# EAGLE board Cohort b tEAM 2 (EAGLE 9.6.2)
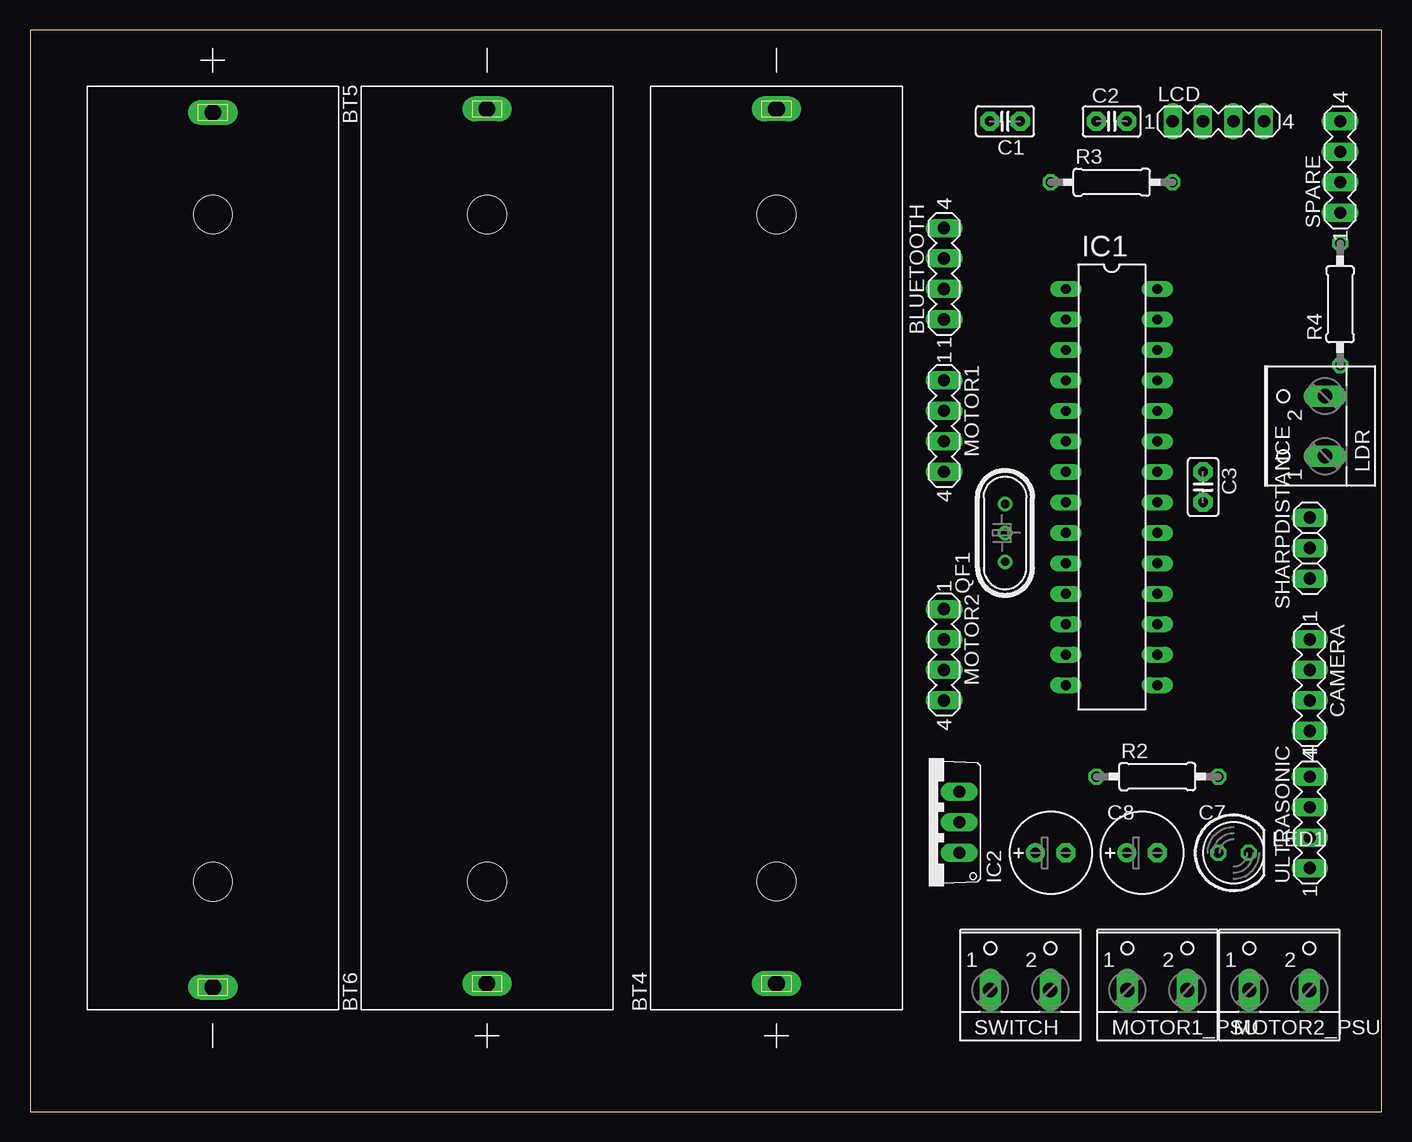
[diagram p0: board, top side]
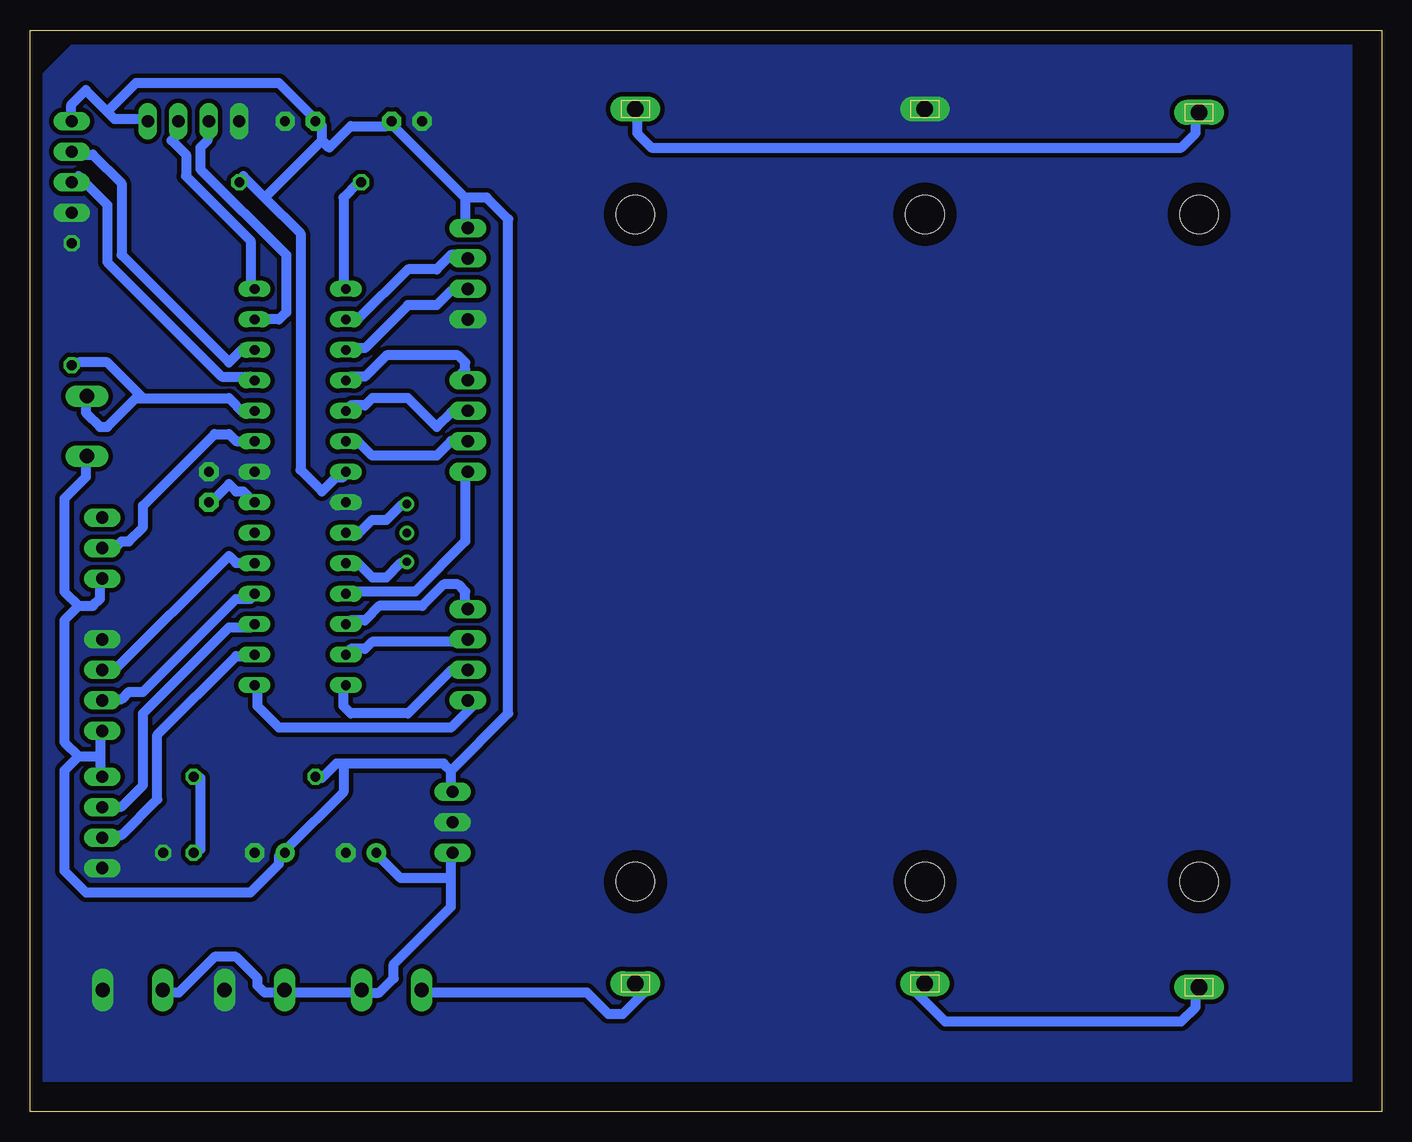
[diagram p1: board, bottom side, seen from below]

Size 112.7 x 90.16 mm. Coordinates in mm from the lower left corner, seen from the top.
Outline: 0,0 112.7,0 112.7,90.16 0,90.16 0,0
Copper layers (1*16): Top 0.035mm / dielectric 1.5mm / Bottom 0.035mm
Design rules "default *": minimum track width 32mil, minimum drill 0.35mm, track to track 15mil, track to pad 15mil, pad to pad 6mil, via to via 6mil, smd to smd 6mil, copper to edge 40mil, drill to drill 6mil, minimum pad ring 10mil, minimum via ring 8mil, stop-mask expansion 4mil, vias tented up to drill 0mil, thermal gap 0mil

## Footprints (pad centres in the part's own frame; a part is rotated, then mirrored left to right if it is on the bottom)
MA04-1 = drill 1.016 long: 1 -3.81,0; 2 -1.27,0; 3 1.27,0; 4 3.81,0
BAT_BK-18650-PC2 = drill 1.38 long: + -36.3,0; - 36.6,0 | hole 3.2: -27.805,0; 27.81,0
C2.5-2 = drill 0.813 pad 1.6 octagon: 1 -1.27,0; 2 1.27,0
E2,5-7 = drill 0.813 pad 1.6: + -1.27,0 | drill 0.813 pad 1.6 octagon: - 1.27,0
DIL28-3 = drill 0.813 long: 1 -16.51,-3.81; 2 -13.97,-3.81; 3 -11.43,-3.81; 4 -8.89,-3.81; 5 -6.35,-3.81; 6 -3.81,-3.81; 7 -1.27,-3.81; 8 1.27,-3.81; 9 3.81,-3.81; 10 6.35,-3.81; 11 8.89,-3.81; 12 11.43,-3.81; 13 13.97,-3.81; 14 16.51,-3.81; 15 16.51,3.81; 16 13.97,3.81; 17 11.43,3.81; 18 8.89,3.81; 19 6.35,3.81; 20 3.81,3.81; 21 1.27,3.81; 22 -1.27,3.81; 23 -3.81,3.81; 24 -6.35,3.81; 25 -8.89,3.81; 26 -11.43,3.81; 27 -13.97,3.81; 28 -16.51,3.81
TO220V = drill 1.016 long: 1 -2.54,-2.54; 2 0,-2.54; 3 2.54,-2.54
W237-102 = drill 1.194 long: 1 -2.5,-1.27; 2 2.5,-1.27
LED5MM = drill 0.813 octagon: A -1.27,0; K 1.27,0
HC49U = drill 0.7 pad 1.2: 1 -2.413,0; 2 -0.027,0; 3 2.413,0
0207/10 = drill 0.813 octagon: 1 -5.08,0; 2 5.08,0
1X03 = drill 1.016 long: 1 -2.54,0; 2 0,0; 3 2.54,0

## Placement (x,y rotation side)
BLUETOOTH  [MA04-1]  76.2,69.85 90 top
BT4  BK-18650-PC2  [BAT_BK-18650-PC2]  62.23,46.99 90 top
BT5  BK-18650-PC2  [BAT_BK-18650-PC2]  15.24,46.99 270 top
BT6  BK-18650-PC2  [BAT_BK-18650-PC2]  38.1,46.99 90 top
C1  [C2.5-2]  81.28,82.55 180 top
C2  [C2.5-2]  90.17,82.55 0 top
C3  [C2.5-2]  97.79,52.07 270 top
C7  [E2,5-7]  92.71,21.59 0 top
C8  100U  [E2,5-7]  85.09,21.59 0 top
CAMERA  [MA04-1]  106.68,35.56 270 top
IC1  MEGA8-P  [DIL28-3]  90.17,52.07 270 top
IC2  7805TV  [TO220V]  74.93,24.13 90 top
LCD  [MA04-1]  99.06,82.55 0 top
LDR  [W237-102]  106.68,57.15 90 top
LED1  [LED5MM]  100.33,21.59 0 top
MOTOR1  [MA04-1]  76.2,57.15 270 top
MOTOR1_PSU  [W237-102]  93.98,11.43 0 top
MOTOR2  [MA04-1]  76.2,38.1 270 top
MOTOR2_PSU  [W237-102]  104.14,11.43 0 top
QF1  8M10AHC49T  [HC49U]  81.28,48.26 90 top
R2  [0207/10]  93.98,27.94 0 top
R3  10k  [0207/10]  90.17,77.47 0 top
R4  10k  [0207/10]  109.22,67.31 90 top
SHARPDISTANCE  [1X03]  106.68,46.99 90 top
SPARE  [MA04-1]  109.22,78.74 90 top
SWITCH  [W237-102]  82.55,11.43 0 top
ULTRASONIC  [MA04-1]  106.68,24.13 90 top

## Library data of the parts
BLUETOOTH CAMERA LCD MOTOR1 MOTOR2 SPARE ULTRASONIC = con-lstb; OC_FARNELL: unknown; OC_NEWARK: unknown
BT4-BT6 = BK-18650-PC2; AVAILABILITY: In Stock; DESCRIPTION: Battery Holder (Open) 18650 1 Cell PC Pin; MF: MPD (Memory Protection Devices); MP: BK-18650-PC2; PACKAGE: None; PRICE: None; PURCHASE-URL: https://pricing.snapeda.com/search/part/BK-18650-PC2/?ref=eda
C1-C3 = capacitor-wima
C7 C8 = rcl; SPICEPREFIX: C
IC1 = atmel; OC_FARNELL: unknown; OC_NEWARK: unknown
IC2 = linear
LDR MOTOR1_PSU MOTOR2_PSU SWITCH = con-wago-500; MPN: 237-102; OC_FARNELL: unknown; OC_NEWARK: 70K9898
LED1 = led
QF1 = crystal; OC_FARNELL: unknown; OC_NEWARK: unknown
R2-R4 = rcl; SPICEPREFIX: R
SHARPDISTANCE = pinhead

## Nets
+12V: C8.+ IC2.1 MOTOR1_PSU.1 MOTOR2_PSU.1 SWITCH.2
AVCC: IC1.20
ECHO: IC1.17 ULTRASONIC.3
GND: BLUETOOTH.1 BT6.- C1.2 C2.2 C3.1 C7.- C8.- CAMERA.1 IC1.8 IC1.22 IC2.2 LCD.1 LED1.K MOTOR1_PSU.2 MOTOR2_PSU.2 R4.2 SPARE.1 ULTRASONIC.1
IN1: IC1.4 MOTOR1.1
IN2: IC1.5 MOTOR1.2
IN3: IC1.6 MOTOR1.3
IN4: IC1.11 MOTOR1.4
IN5: IC1.12 MOTOR2.1
IN6: IC1.13 MOTOR2.2
IN7: IC1.14 MOTOR2.3
IN8: IC1.15 MOTOR2.4
LDR: IC1.24 LDR.2 R4.1
N$1: BT4.- BT5.+
N$2: BT5.- BT6.+
N$3: LED1.A R2.2
N$5: IC1.1 R3.1
N$6: C3.2 IC1.21
N$7: IC1.9 QF1.3
N$8: IC1.10 QF1.1
N$9: SHARPDISTANCE.3
N$27: BT4.+ SWITCH.1
RXD: BLUETOOTH.2 IC1.3
SCL: IC1.28 LCD.3
SDA: IC1.27 LCD.2
SP1: CAMERA.3 IC1.18
SP2: CAMERA.2 IC1.19
SP3: IC1.25 SPARE.2
SP4: IC1.26 SPARE.3
TRIGGER: IC1.16 ULTRASONIC.2
TXD: BLUETOOTH.3 IC1.2
V_OUT: IC1.23 SHARPDISTANCE.2
VCC: BLUETOOTH.4 C1.1 C2.1 C7.+ CAMERA.4 IC1.7 IC2.3 LCD.4 LDR.1 R2.1 R3.2 SHARPDISTANCE.1 SPARE.4 ULTRASONIC.4

## Tracks (layer width: path | path; a pad name or v marks a point on that pad's centre or on a via)
+12V
  Bottom 0.813: 77.61,19.48 77.61,17.09 82.38,12.32 82.38,11.12 83.58,9.93 84.77,9.93 SWITCH.2 85.37,9.93 91.34,9.93 MOTOR1_PSU.1 91.94,9.93 93.13,9.93 93.73,10.53 93.73,11.12 95.52,12.92 97.31,12.92 100.29,9.93 101.49,9.93 MOTOR2_PSU.1 | 77.61,19.48 77.61,21.27 IC2.1 | 77.61,19.48 81.79,19.48 83.58,21.27 C8.+
ECHO
  Bottom 0.813: IC1.17 94.32,40.37 96.11,40.37 103.28,33.21 103.28,27.24 105.07,25.45 106.26,25.45 ULTRASONIC.3
GND
  pour Bottom: 2.54,88.9 2.54,2.54 111.76,2.54 111.76,86.36 109.22,88.9 3.81,88.9
IN1
  Bottom 0.813: IC1.4 85.97,61.27 84.77,61.27 82.98,63.06 77.01,63.06 76.42,62.46 76.42,61.86 77.01,61.27 76.42,60.67 MOTOR1.1
IN2
  Bottom 0.813: IC1.5 85.97,58.88 84.77,58.88 84.18,59.47 81.19,59.47 78.8,57.09 77.61,58.28 76.42,58.28 MOTOR1.2
IN3
  Bottom 0.813: IC1.6 85.97,55.89 85.37,55.89 84.18,54.7 78.8,54.7 77.61,55.89 76.42,55.89 MOTOR1.3
IN4
  Bottom 0.813: IC1.11 85.97,43.36 80.59,43.36 76.42,47.54 76.42,52.91 MOTOR1.4
IN5
  Bottom 0.813: IC1.12 85.97,40.97 84.77,40.97 83.58,42.16 80,42.16 78.21,43.95 77.01,43.95 76.42,43.36 76.42,42.16 MOTOR2.1
IN6
  Bottom 0.813: IC1.13 85.97,38.58 84.77,38.58 84.18,39.18 76.42,39.18 MOTOR2.2
IN7
  Bottom 0.813: IC1.14 86.56,35 86.56,33.81 85.97,33.21 81.19,33.21 77.61,36.79 76.42,36.79 MOTOR2.3
IN8
  Bottom 0.813: IC1.15 93.73,35 93.73,33.81 91.94,32.02 77.61,32.02 75.82,33.81 MOTOR2.4
LDR
  Bottom 0.813: 103.28,59.47 103.87,59.47 106.26,57.09 106.86,57.09 108.05,58.28 108.05,59.47 LDR.2 | 103.28,59.47 96.11,59.47 94.92,58.28 94.32,58.28 IC1.24 | 103.28,59.47 106.26,62.46 108.65,62.46 R4.1
N$1
  Bottom 0.813: BT5.+ 15.53,82.75 15.53,81.56 16.73,80.37 60.9,80.37 62.09,81.56 62.09,83.35 BT4.-
N$2
  Bottom 0.813: BT5.- 15.53,9.93 15.53,8.74 16.73,7.54 36.42,7.54 38.81,9.93 38.81,10.53 38.21,11.12 BT6.+
N$3
  Bottom 0.813: LED1.A 98.5,21.87 98.5,27.84 R2.2
N$5
  Bottom 0.813: IC1.1 86.56,69.02 86.56,76.19 85.37,77.38 R3.1
N$6
  Bottom 0.813: IC1.21 94.32,51.12 94.92,51.71 95.52,51.71 96.11,52.31 97.31,51.12 C3.2
N$7
  Bottom 0.813: QF1.3 81.79,50.52 82.98,49.33 84.18,49.33 85.37,48.13 85.97,48.13 IC1.9
N$8
  Bottom 0.813: QF1.1 81.79,45.75 82.98,44.55 84.18,44.55 85.37,45.75 85.97,45.75 IC1.10
N$27
  Bottom 0.813: SWITCH.1 80,9.93 66.27,9.93 64.48,8.14 63.28,8.14 61.49,9.93 61.49,10.53 62.09,11.12 BT4.+
RXD
  Bottom 0.813: IC1.3 85.97,63.65 84.77,63.65 81.19,67.23 78.8,67.23 77.61,68.43 76.42,68.43 BLUETOOTH.2
SCL
  Bottom 0.813: IC1.28 94.32,69.02 94.32,72.61 99.69,77.98 99.69,79.77 100.89,80.96 100.29,81.56 100.29,82.16 LCD.3
SDA
  Bottom 0.813: IC1.27 91.94,66.04 91.34,66.64 91.34,71.41 98.5,78.57 98.5,80.37 97.9,80.96 97.9,82.16 LCD.2
SP1
  Bottom 0.813: IC1.18 94.32,42.76 95.52,42.76 103.28,35 104.47,35 105.07,34.4 106.26,34.4 CAMERA.3
SP2
  Bottom 0.813: IC1.19 94.32,45.75 95.52,45.75 96.11,46.34 105.66,36.79 106.26,36.79 CAMERA.2
SP3
  Bottom 0.813: IC1.25 94.32,61.27 96.71,61.27 106.26,70.81 106.26,75.59 108.65,77.98 SPARE.2
SP4
  Bottom 0.813: IC1.26 94.32,63.65 94.92,63.65 96.11,62.46 105.07,71.41 105.07,77.38 107.45,79.77 108.65,79.77 SPARE.3
TRIGGER
  Bottom 0.813: IC1.16 94.32,37.99 95.52,37.99 102.08,31.42 102.08,26.05 105.07,23.06 106.26,23.06 ULTRASONIC.2
TXD
  Bottom 0.813: IC1.2 85.37,66.04 81.19,70.22 78.8,70.22 77.61,71.41 76.42,71.41 BLUETOOTH.3
V_OUT
  Bottom 0.813: IC1.23 94.32,55.89 95.52,55.89 96.11,56.49 97.31,56.49 103.28,50.52 103.28,48.73 104.47,47.54 105.07,47.54 105.66,46.94 106.26,46.94 SHARPDISTANCE.2
VCC
  Bottom 0.813: 76.42,76.19 76.42,73.8 BLUETOOTH.4 | 76.42,76.19 82.38,82.16 C1.1 82.98,82.16 85.97,82.16 87.76,80.37 88.35,80.96 | 106.26,83.35 108.05,85.14 109.24,83.95 109.24,82.75 SPARE.4 | 106.26,83.35 105.66,82.75 103.28,82.75 LCD.4 | 93.13,76.19 94.92,77.98 R3.2 | 93.13,76.19 90.14,73.2 90.14,53.51 88.35,51.71 87.16,52.91 86.56,52.91 IC1.7 | 88.35,80.96 88.35,82.16 C2.1 88.95,82.75 91.94,85.74 103.87,85.74 106.26,83.35 | 93.13,76.19 88.35,80.96 | 86.56,29.03 78.21,29.03 77.61,28.44 | 86.56,29.03 87.16,29.03 88.35,27.84 R2.1 | 77.61,28.44 77.61,27.24 IC2.3 | 86.56,29.03 86.56,26.65 91.34,21.87 C7.+ 91.94,21.27 91.94,20.68 94.32,18.29 108.05,18.29 109.84,20.08 109.84,28.44 108.65,29.63 | 106.86,29.63 106.86,31.42 CAMERA.4 | 106.86,29.63 106.86,28.44 ULTRASONIC.4 | 108.65,42.16 107.45,42.16 106.86,42.76 106.86,43.95 SHARPDISTANCE.1 | 108.65,42.16 109.84,43.36 109.84,51.12 108.05,52.91 108.05,54.1 LDR.1 | 108.65,29.63 106.86,29.63 | 108.65,29.63 109.84,30.82 109.84,40.97 108.65,42.16 | 76.42,76.19 74.62,76.19 72.83,74.4 72.83,33.21 77.61,28.44